# Altium PCB RFCU_INTERFACE.PcbDoc
Units mil, origin at the board's own origin, x right, y up, seen from the top; angles counter-clockwise.
Board outline 2125 x 2650 mil, 2 copper layers (Top Layer, Bottom Layer); 75 components, 56 nets, 236 pads, 31 vias.
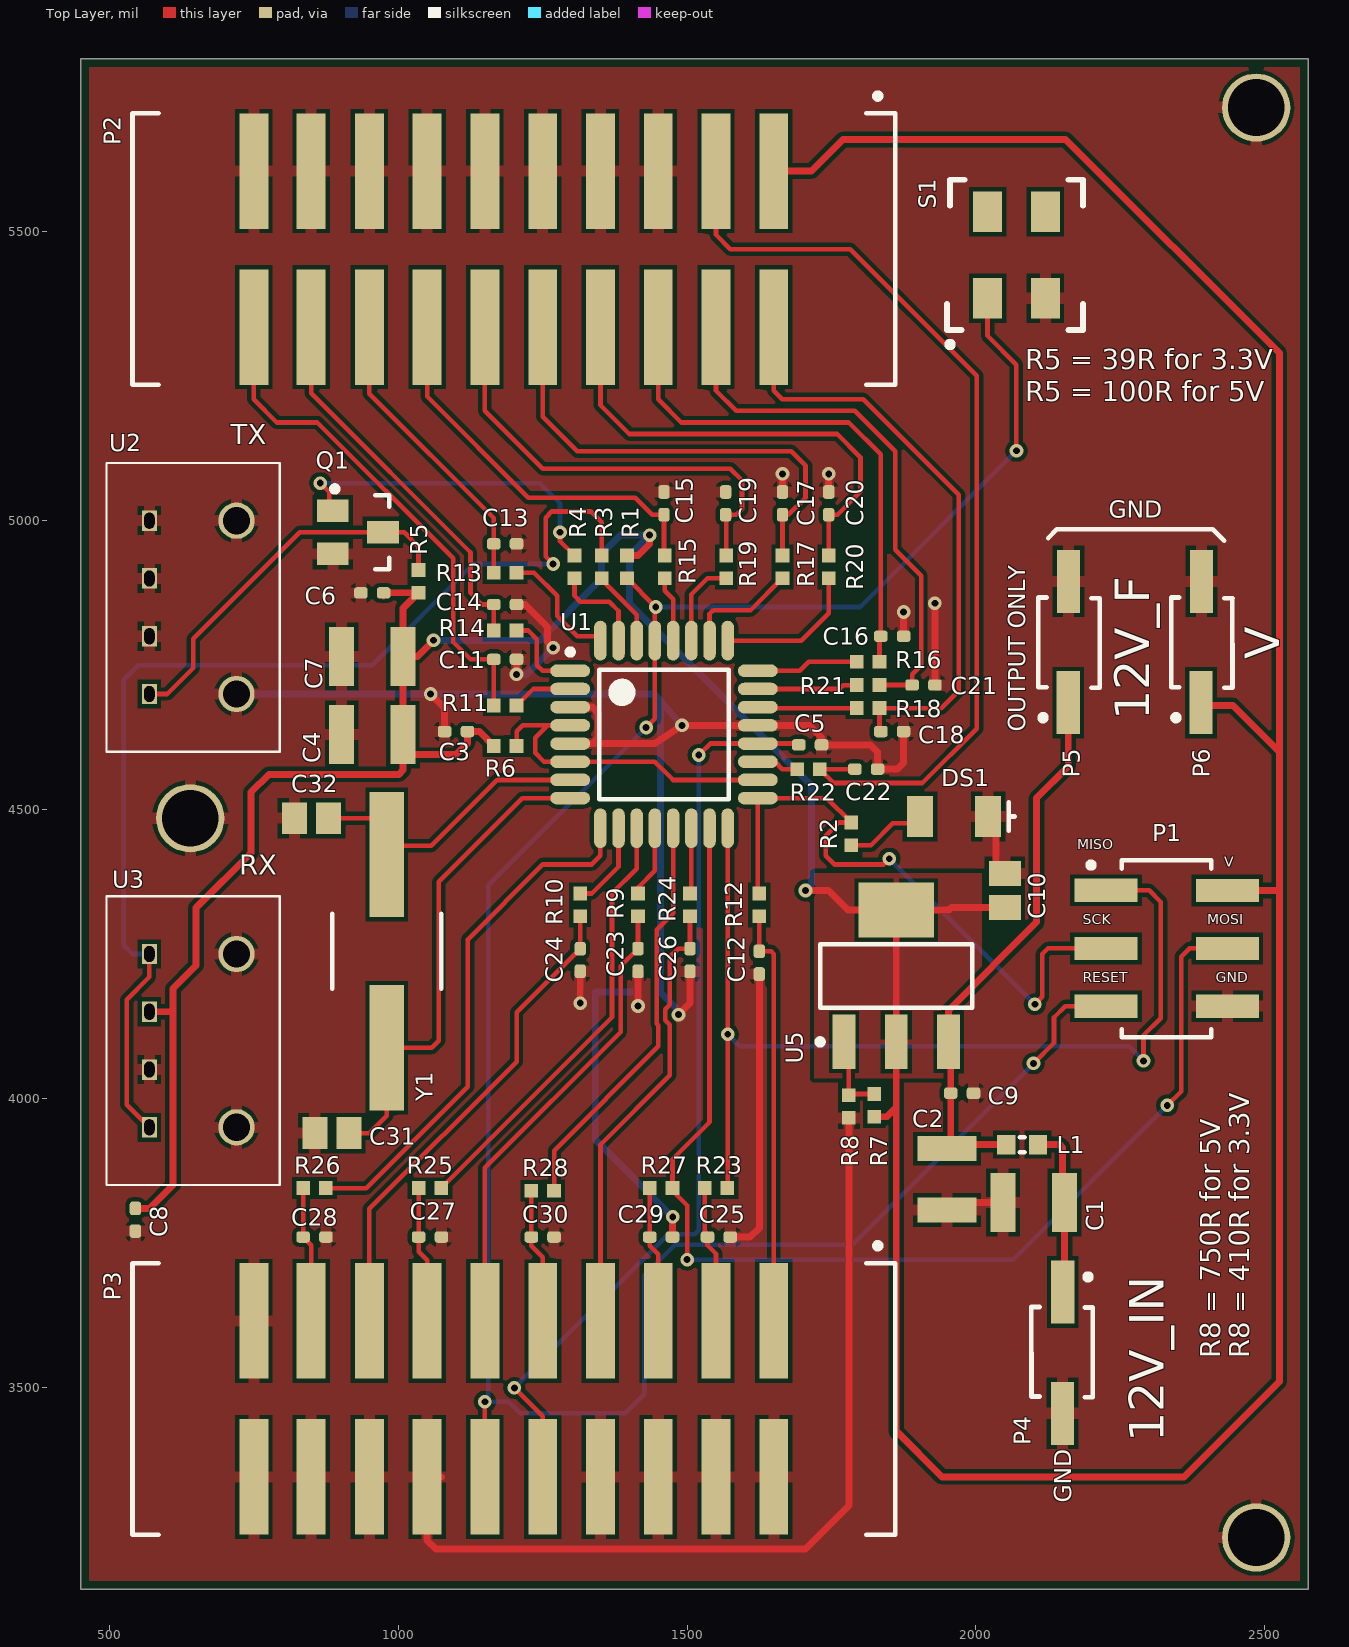
[diagram p0: Top Layer view]
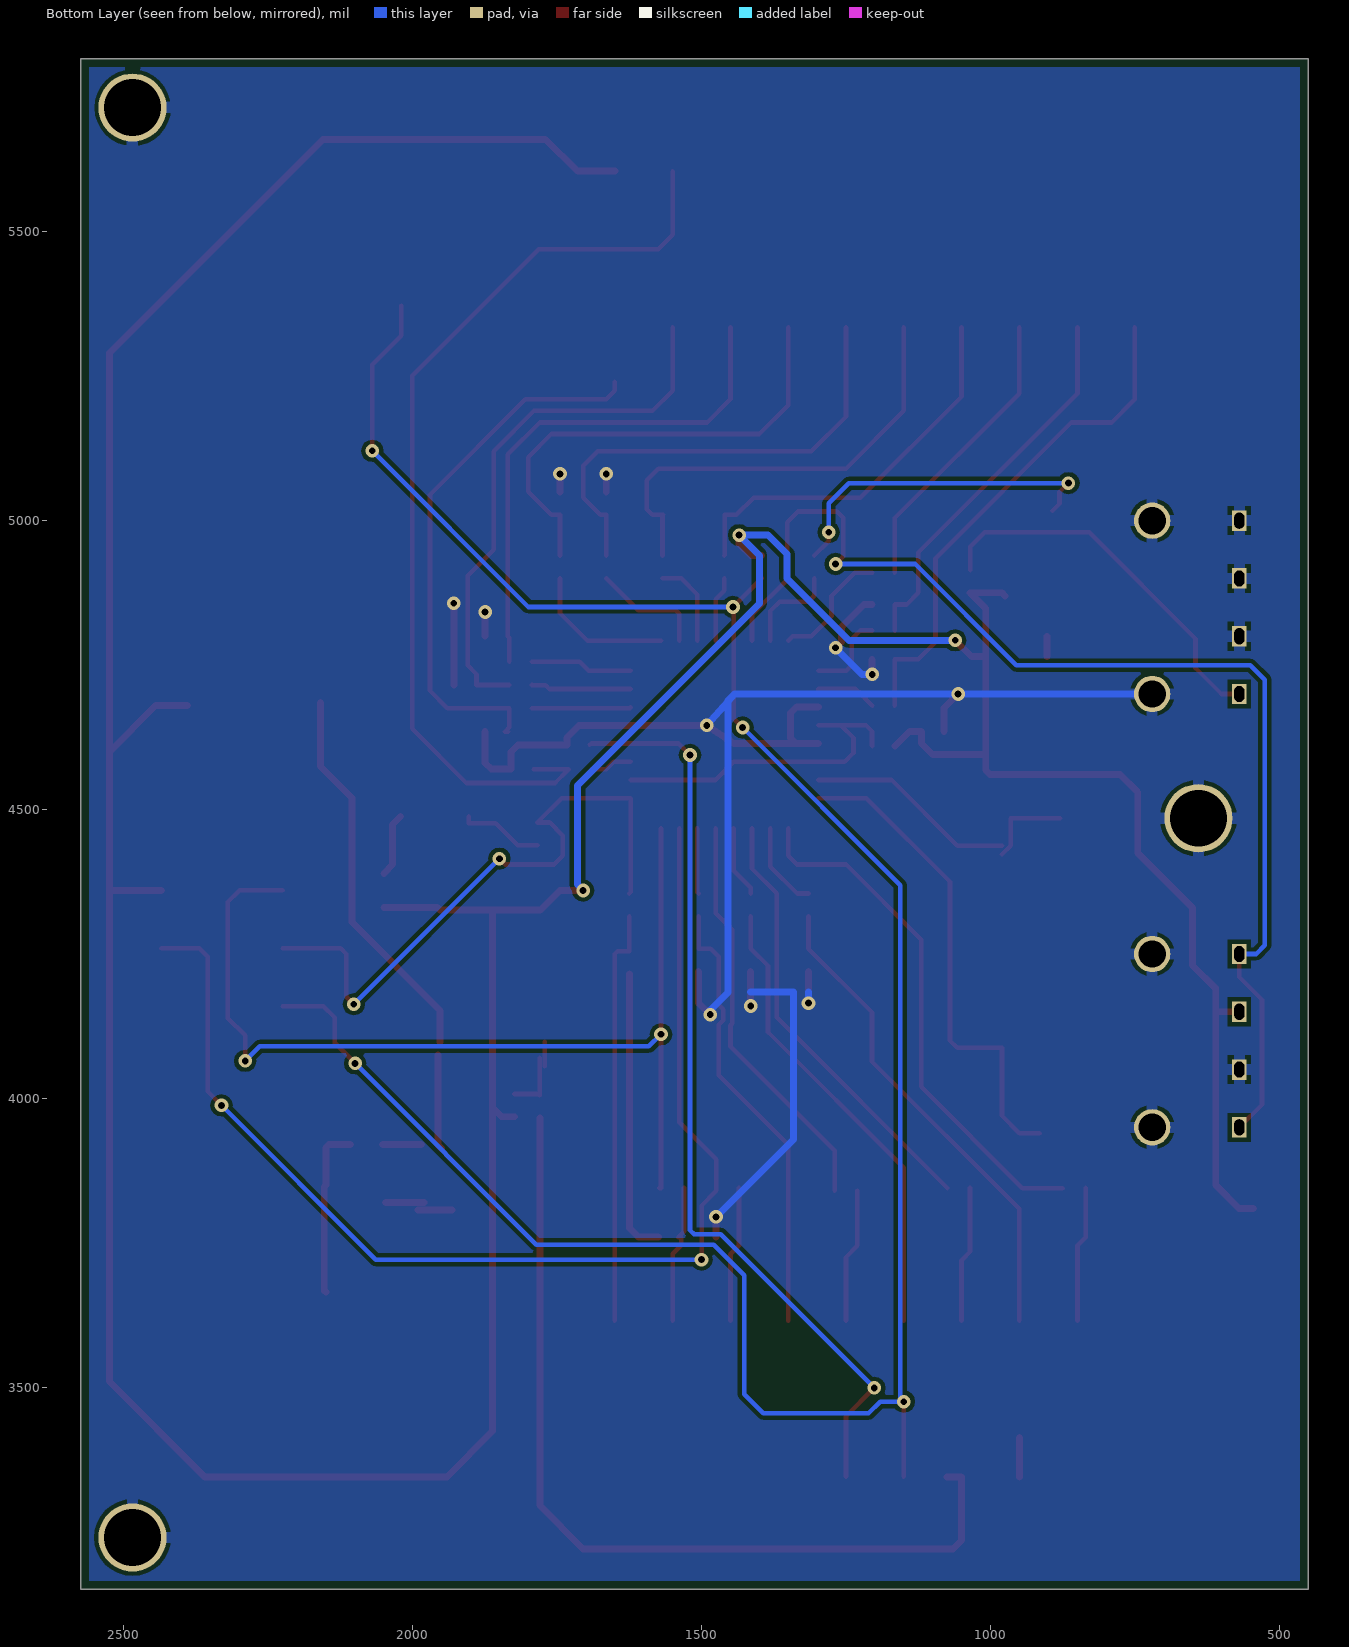
[diagram p1: Bottom Layer view, seen from below]
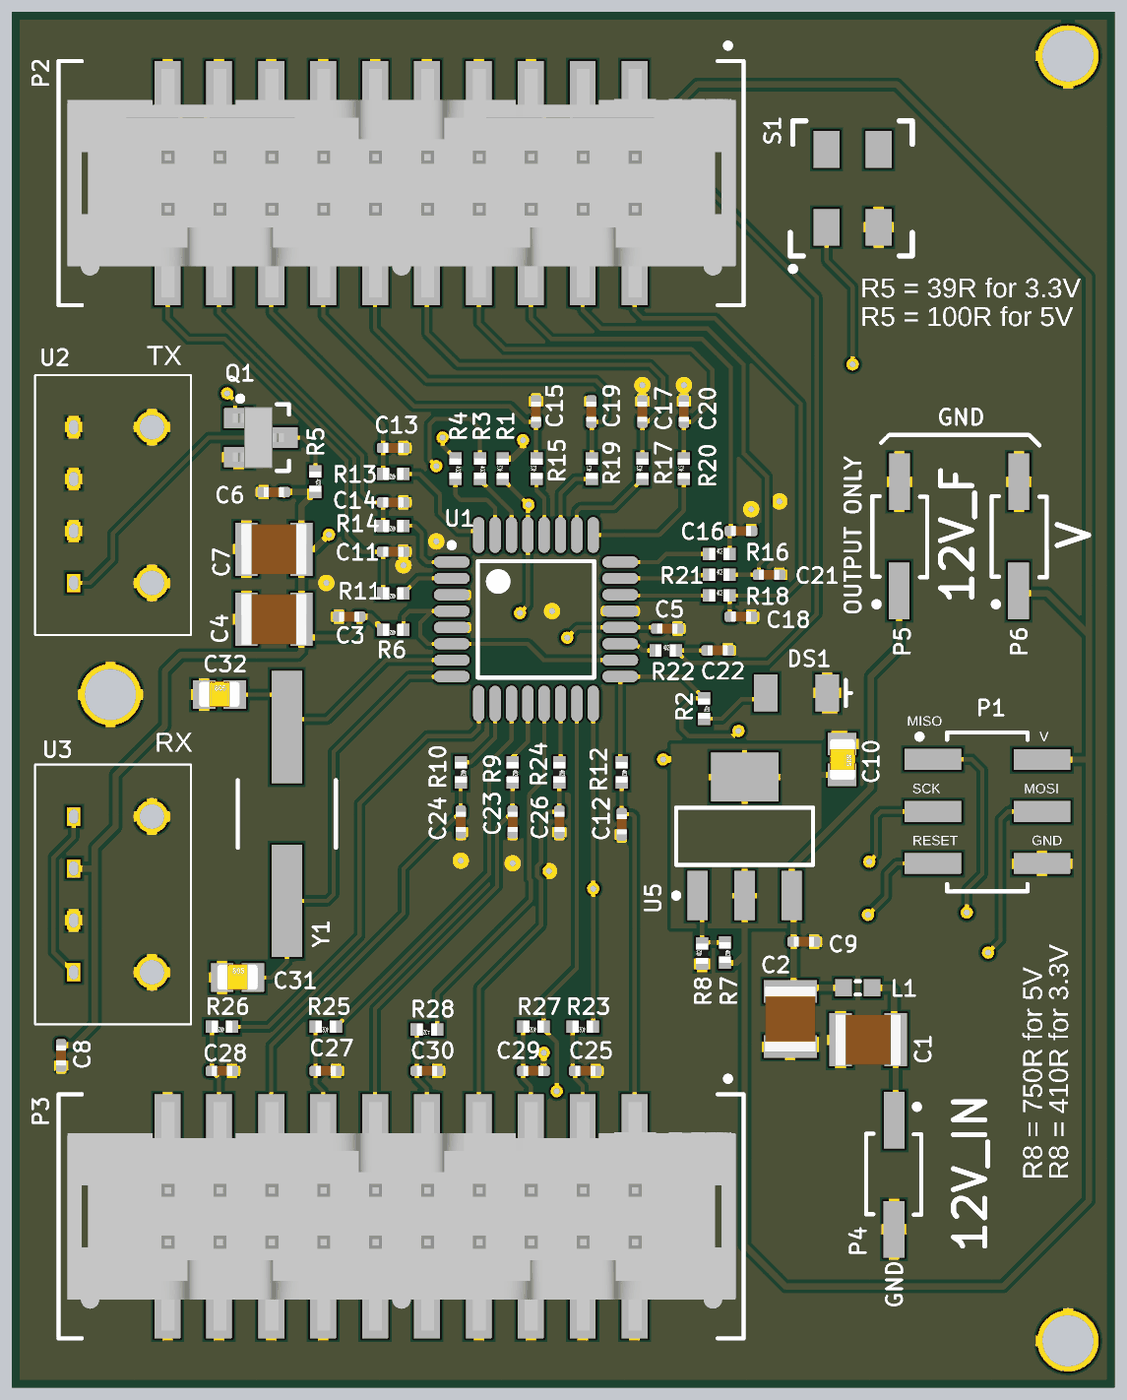
[diagram p2: 3D render of the assembled board from above, using the file's embedded part models]

## Layer stack, top to bottom
Top Layer: signal copper 1.4
Dielectric: dielectric 12.6, FR-4, Dk 4.8
Bottom Layer: signal copper 1.4

## Board outline
450,5800 450,3150 2575,3150 2575,5800 450,5800

## Design rules (kind name [scope] priority, off if disabled: settings)
Clearance [All] p1: gap=7
MinimumSolderMaskSliver [All] p1: minsoldermaskwidth=0.39
PolygonConnect Via_connect [isVia] p1: connectstyle=Direct reliefconductorwidth=10 reliefentries=4 polygonreliefangle="90 Angle"
PolygonConnect [All] p2: connectstyle=Relief reliefconductorwidth=20 reliefentries=4 polygonreliefangle="90 Angle"
RoutingVias [All] p1: holewidth=11.81 width=23.62 viastyle="Through Hole" minholewidth=11.81 minwidth=23.62 maxholewidth=11.81 maxwidth=23.62
SilkscreenOverComponentPads [All] p1: minsilkscreentomaskgap=3.94
SolderMaskExpansion [All] p1: expansion=4
Width Power [InNetClass('Power')] p1: maxlimit=12 minlimit=12 preferedwidth=12
Width [All] p2: maxlimit=8 minlimit=8 preferedwidth=8
26 further rules are at their usual default settings.

## Classes and differential pairs
net class Power: 12V 12V_IN GND V
component class Sheet1: C1 C2 C3 C4 C5 C6 C7 C8 C9 C10 C31 C32 DS1 L1 P1 P2 P3 P4 P5 P6 Q1 R1 R2 R3 R4 R5 R6 R7 R8 S1 U1 U2 U3 U5 Y1
component class Sheet2: C11 C12 C13 C14 C15 C16 C17 C18 C19 C20 C21 C22 C23 C24 C25 C26 C27 C28 C29 C30 R9 R10 R11 R12 R13 R14 R15 R16 R17 R18 R19 R20 R21 R22 R23 R24 R25 R26 R27 R28

## Components (designator, comment, footprint, x,y, rotation, side; value= is the part's Value field where it differs from the comment)
C1 "10uF" CAPC3225X200L 2100,3820 r0 top
C2 "10uF" CAPC3225X200L 1950,3860 r90 top
C3 "0.1uF" CAPC1005X60L 1100,4635 r0 top
C4 "10uF" CAPC3225X200L 955,4630 r0 top
C5 "0.1uF" CAPC1005X60L 1713,4612 r180 top
C6 "0.1uF" CAPC1005X60L 955,4875 r0 top
C7 "10uF" CAPC3225X200L 955,4765 r0 top
C8 "0.1uF" CAPC1005X60L 545,3790 r270 top
C9 "0.1uF" CAPC1005X60L 1976,4009 r180 top
C10 "1uF" CAPC2012X127L 2050,4360 r270 top
C11 "0.1uF" CAPC1005X60L 1185,4760 r180 top
C12 "0.1uF" CAPC1005X60L 1625,4235 r90 top
C13 "0.1uF" CAPC1005X60L 1185,4960 r180 top
C14 "0.1uF" CAPC1005X60L 1185,4855 r180 top
C15 "0.1uF" CAPC1005X60L 1460,5030 r270 top
C16 "0.1uF" CAPC1005X60L 1855,4800 r180 top
C17 "0.1uF" CAPC1005X60L 1665,5030 r270 top
C18 "0.1uF" CAPC1005X60L 1855,4635 r180 top
C19 "0.1uF" CAPC1005X60L 1566.67,5030 r270 top
C20 "0.1uF" CAPC1005X60L 1745,5030 r270 top
C21 "0.1uF" CAPC1005X60L 1909.2,4715.67 r180 top
C22 "0.1uF" CAPC1005X60L 1810,4570 r180 top
C23 "0.1uF" CAPC1005X60L 1415,4239.69 r90 top
C24 "0.1uF" CAPC1005X60L 1315,4239.69 r90 top
C25 "0.1uF" CAPC1005X60L 1555,3760 r180 top
C26 "0.1uF" CAPC1005X60L 1505,4239.69 r90 top
C27 "0.1uF" CAPC1005X60L 1055,3760 r180 top
C28 "0.1uF" CAPC1005X60L 855,3760 r180 top
C29 "0.1uF" CAPC1005X60L 1455,3760 r180 top
C30 "0.1uF" CAPC1005X60L 1250,3760 r180 top
C31 "1uF" CAPC2012X127L 885,3940 r0 top
C32 "1uF" CAPC2012X127L 850,4485 r0 top
DS1 "SML-LX1206GC-TR" LEDC3216X120N 1962,4488 r180 top
L1 "180R" INDC1608X130L 2080,3920 r180 top
P1 "SMT Header 3X2" "HEADER 3x2, SMT" 2330,4260 r270 top
P2 "N2520-6V0C-RB-WE" 3M_N2520-6V0C-RB-WE 1200,5470 r180 top locked
P3 "N2520-6V0C-RB-WE" 3M_N2520-6V0C-RB-WE 1200,3480 r180 top locked
P4 "SMT Header 1X2" "HEADER 1x2, SMT" 2150,3560 r180 top
P5 "SMT Header 1X2" "HEADER 1x2, SMT" 2160,4790 r0 top
P6 "SMT Header 1X2" "HEADER 1x2, SMT" 2390,4790 r0 top
Q1 "BSS138" SOT95P245X110-3N 930,4980 r0 top
R1 "1K" RESC1005X40L 1396,4920 r90 top
R2 "768R" RESC1005X40L 1784,4458 r270 top
R3 "1K" RESC1005X40L 1352,4920 r270 top
R4 "1K" RESC1005X40L 1305,4920 r270 top
R5 "47R" RESC1005X40L 1035,4895 r270 top
R6 "0R" RESC1005X40L 1185,4610 r180 top
R7 "249R" RESC1005X40L 1824,3988 r270 top
R8 "1K" RESC1005X40L 1780,3986 r90 top
R9 "75R" RESC1005X40L 1415,4335 r270 top
R10 "75R" RESC1005X40L 1315,4335 r270 top
R11 "75R" RESC1005X40L 1185,4680 r180 top
R12 "75R" RESC1005X40L 1625,4335 r270 top
R13 "75R" RESC1005X40L 1185,4910 r180 top
R14 "75R" RESC1005X40L 1185,4810 r180 top
R15 "75R" RESC1005X40L 1461,4920 r90 top
R16 "75R" RESC1005X40L 1813.2,4755.67 r0 top
R17 "75R" RESC1005X40L 1665,4920 r90 top
R18 "75R" RESC1005X40L 1813.2,4675.67 r0 top
R19 "75R" RESC1005X40L 1567.67,4920 r90 top
R20 "75R" RESC1005X40L 1745,4920 r90 top
R21 "75R" RESC1005X40L 1813.2,4715.67 r0 top
R22 "75R" RESC1005X40L 1710,4570 r0 top
R23 "75R" RESC1005X40L 1550,3845 r180 top
R24 "75R" RESC1005X40L 1505,4335 r270 top
R25 "75R" RESC1005X40L 1055,3845 r180 top
R26 "75R" RESC1005X40L 855,3845 r180 top
R27 "75R" RESC1005X40L 1455,3845 r180 top
R28 "75R" RESC1005X40L 1250,3840 r180 top
S1 "7914J-1-000-E" 7914J-X-XXX-X 2070,5460 r0 top
U1 "ATmega328P" TQFP-32A 1460,4630 r0 top
U2 "HFBR-1505CFZ" HFBR-X505XFZ 720,5000 r270 top locked
U3 "HFBR-2505CFZ" HFBR-X505XFZ 720,4250 r270 top locked
U5 "LM317" SOT223_4N 1862,4212 r90 top
Y1 "ATS040B" HC-49SM 980,4255 r90 top

## Footprints (in the part's own frame and the unit in brackets; to place one, negate y for a bottom-side part, rotate by r counter-clockwise, add the part's x,y. Pads: shape width x height; smd on the part's side, far side on the other; paste and mask are expansions set on the pad)
3M_N2520-6V0C-RB-WE [mm] "3m, 2.56mm pitch, Shrouded, 10x2 Connector"
  rect 1.27x5.08 smd: 1(-11.43,-3.43) 2(-11.43,3.43) 3(-8.89,-3.43) 4(-8.89,3.43) 5(-6.35,-3.43) 6(-6.35,3.43) 7(-3.81,-3.43) 8(-3.81,3.43) 9(-1.27,-3.43) 10(-1.27,3.43) 11(1.27,-3.43) 12(1.27,3.43) 13(3.81,-3.43) 14(3.81,3.43) 15(6.35,-3.43) 16(6.35,3.43) 17(8.91,-3.43) 18(8.91,3.43) 19(11.43,-3.43) 20(11.43,3.43)
  silkscreen extent -16.76,-6.86 16.76,5.97, body extent -16.38,-5.59 16.33,5.59, height 10.2
7914J-X-XXX-X [mm] "Surface mount, Sealed key switch"
  rect 1.27x1.79 smd: 1(-1.27,-1.905) 2(1.27,-1.905) 3(-1.27,1.905) 4(1.27,1.905)
  silkscreen extent -3.05,-4.06 2.92,3.3, body extent -2.54,-2.54 2.54,2.54, height 4.19
CAPC1005X60L [mm] "Chip Capacitor, Body 1.0x0.5mm, IPC High Density"
  rrect50% 0.6x0.5 smd: 1(-0.5,0) 2(0.5,0)
  body extent -0.5,-0.25 0.5,0.25, height 0.49
CAPC2012X127L [mm] "Chip Capacitor, Body 2.0x1.3mm, IPC High Density"
  rect 1.1x1.4 smd: 1(-0.75,0) 2(0.75,0)
  body extent -1,-0.61 1,0.64, height 0.78
CAPC3225X200L [mm] "Chip Capacitor, Body 3.2x2.5mm, IPC High Density"
  rect 1.1x2.6 smd: 1(-1.35,0) 2(1.35,0)
  body extent -1.6,-1.25 1.6,1.25, height 2.5
HC-49SM [mm]
  rect 5.5x1.5 smd: 1(-4.25,0) 2(4.25,0)
  silkscreen extent -1.65,-2.4 1.65,2.4, body extent -6.4,-2.42 6.4,2.42, height 4.3
"HEADER 1x2, SMT" [mm] "SMT Header, 1 x 2 rows, 2.54mm pitch"
  rect 1.02x2.77 smd: 1(-0.008,-2.667) 2(0.008,2.667)
  silkscreen extent -1.32,-3.45 1.37,1.96
"HEADER 3x2, SMT" [mm] "SMT Header, 3 x 2 rows, 2.54mm pitch"
  rect 1.02x2.77 smd: 1(-2.548,-2.667) 2(-2.531,2.667) 3(0.009,-2.667) 4(0.009,2.667) 5(2.549,-2.667) 6(2.549,2.667)
  silkscreen extent -3.86,-3.45 3.91,1.96
HFBR-X505XFZ [mm]
  round 1.6 hole 1.2: 1(7.62,0) 4(0,0)
  rect 0.9x0.65 hole 0.45 slot 0.7 at 0 deg: 5(0,-3.83) 6(2.54,-3.83) 7(5.08,-3.83) 8(7.62,-3.83)
  silkscreen extent -2.54,-5.72 10.16,1.91, body extent -2.54,-11.93 10.16,1.9, height 9.85
INDC1608X130L [mm] "Chip Inductor, 2-Leads, Body 1.6x0.8mm, IPC High Density"
  rect 0.8x0.85 smd: 1(-0.7,0) 2(0.7,0)
  silkscreen extent -0.1,-0.33 0.1,0.33, body extent -0.88,-0.48 0.87,0.48, height 1.3
LEDC3216X120N [mm] "LED Chip, 3.2mm x 1.6mm"
  rect 1.15x1.8 smd: 1(-1.5,0) 2(1.5,0)
  silkscreen extent -2.67,-0.64 -2.41,0.63, body extent -1.52,-0.89 1.52,0.89, height 1.2
RESC1005X40L [mm] "Chip Resistor, Body 1.1x0.5mm, IPC High Density"
  rect 0.6x0.6 smd: 1(-0.5,0) 2(0.5,0)
  body extent -0.5,-0.3 0.5,0.3, height 0.2
SOT95P245X110-3N [mm] "SOT23, 3-Leads, Body 3.0x2.6mm (max), Pitch 0.95mm, IPC Medium Density"
  rect 1.4x1 smd: 1(-1.1,0.95) 2(-1.1,-0.95) 3(1.1,0)
  silkscreen extent -1.14,-1.63 1.37,2.03, body extent -1.38,-1.5 1.12,1.5, height 1.05
SOT223_4N [mm] "SOT223, 4-Leads, Body 6.5x3.5mm, Pitch 2.3mm, Lead Span 7mm, IPC Medium Density"
  rect 2.4x1 smd: 1(-2.9,2.3) 2(-2.9,0) 3(-2.9,-2.3)
  rect 2.4x3.3 smd: 4(2.9,0)
  silkscreen extent -3.02,-3.35 1.4,3.47, body extent -1.85,-3.35 1.85,3.35, height 1.8
TQFP-32A [mm] "TQFP, 32-Leads, Body 9.3x9.3mm (max), Pitch 0.80mm, IPC Medium Density"
  oval 1.75x0.55 smd: 1(-4.125,2.8) 2(-4.125,2) 3(-4.125,1.2) 4(-4.125,0.4) 5(-4.125,-0.4) 6(-4.125,-1.2) 7(-4.125,-2) 8(-4.125,-2.8) 17(4.125,-2.8) 18(4.125,-2) 19(4.125,-1.2) 20(4.125,-0.4) 21(4.125,0.4) 22(4.125,1.2) 23(4.125,2) 24(4.125,2.8)
  oval 0.55x1.75 smd: 9(-2.8,-4.125) 10(-2,-4.125) 11(-1.2,-4.125) 12(-0.4,-4.125) 13(0.4,-4.125) 14(1.2,-4.125) 15(2,-4.125) 16(2.8,-4.125) 25(2.8,4.125) 26(2,4.125) 27(1.2,4.125) 28(0.4,4.125) 29(-0.4,4.125) 30(-1.2,4.125) 31(-2,4.125) 32(-2.8,4.125)
  silkscreen extent -4.25,-2.85 2.85,3.75, body extent -3.5,-3.5 3.5,3.5, height 1.2

## Part data
C1 C2 C4 C7: library part CAP-CER-5, "10uF, Ceramic Capacitor"
C3 C5 C6 C8 C9 C11 C12 C13 C14 C15 C16 C17 C18 C19 C20 C21 C22 C23 C24 C25 C26 C27 C28 C29 C30: library part CAP-CER-1, "0.1uF, Ceramic Capacitor"
C10 C31 C32: library part CAP-CER-8, "1uF, Ceramic Capacitor"
DS1: library part OPTO-LED-0, "Green, Surface mount, LED, 1206"
L1: library part IND-FB-2, "180 Ohm, Chip Ferrite Brad"
P1: "2x3, 2.54 mm Pitch, Male Header, Surface Mount"
P2 P3: library part CONN-PCB-10, "2x10, 2.54mm Pitch, Male Shrouded Header"
P4 P5 P6: library part CONN-PCB-28, "1x2, 2.54 mm Pitch, Male Header, Surface Mount"
Q1: library part TRANS-NFET-0, "N-Channel Logic Level Enhancement Mode Field Effect Transistor"
R1 R3 R4 R8: library part RES-TF-8, "1K, 1.1mm x 0.5mm, Thick Film Resistor"
R2: library part RES-TF-48, "768R, 1.1mm x 0.5mm, Thick Film Resistor"
R5: library part RES-TF-12, "47R, 1.1mm x 0.5mm, Thick Film Resistor"
R6: library part RES-TF-0, "0R, 1.1mm x 0.5mm, Thick Film Resistor"
R7: library part RES-TF-15, "249R, 1.1mm x 0.5mm, Thick Film Resistor"
R9 R10 R11 R12 R13 R14 R15 R16 R17 R18 R19 R20 R21 R22 R23 R24 R25 R26 R27 R28: library part RES-TF-32, "75R, 1.1mm x 0.5mm, Thick Film Resistor"
S1: library part ELMECH-SW-1, "4mm, Surface mount, J-Hook, Sealed Key Switch"
U1: library part IC-CPU-2, "8-Bit Microcontroller with 32KB Flash"
U2: library part OPTO-TX-0, "650nm Fibre Optic Transmitter"
U3: library part OPTO-RX-0, "2MBd Fibre Optic Receiver"
U5: library part IC-REG-9, "Adjustable Voltage regulator 1.25V-37V"
Y1: library part RESN-XTAL-6, "4 MHz, Surface mount, Crystal Oscillator"

## Free pads (board coordinates)
  round 118.11 hole 98.43: 2(640,4485) 2(2485,3240) 2(2485,5715)

## Via types
v1: diameter 23.62, hole 11.81, Top Layer to Bottom Layer, 31 vias

## Nets (pads, with @x,y where several pads share a name; then routed paths per layer and width w, separated by ;. In a path a pad name is that pad's centre, name@x,y a point inside that pad or via, vN(x,y) a via of type N, cw(c..) or ccw(c..) an arc to the next point about the centre after c; other vN are vias at no path point)
12V: C2.2 C9.2 L1.2 P5.1 U5.3 | length 904.9
  Top Layer w12: C2.2 1956.31,3919.46 C9.2 U5.3@1956.31,4075 ; U5.3 1952.55,4152.55 2105,4305 2105,4520 2159.67,4574.67 P5.1 ; C2.2@1985,3920 L1.2
12V_IN: C1.2 L1.1 P4.1 | length 297
  Top Layer w12: L1.1 2145,3920 2150,3915 2150,3850.15 2153.15,3847 C1.2 2153.15,3667.82 P4.1
A0: R21.1 U1.23 | length 174
  Top Layer w8: U1.23 1763.74,4708.74 1770,4715 1792.85,4715 R21.1
A0_F: C21.2 P2.4 R21.2 | length 949.5
  Top Layer w8: P2.4 1550,5225 1585,5190 1790,5190 1860,5120 1860,4950 1905,4905 1905,4750 1889.52,4734.52 C21.2 R21.2
A1: R16.1 U1.24 | length 177.5
  Top Layer w8: U1.24 1695.24,4740.24 1710.67,4755.67 R16.1
A1_F: C16.2 P2.6 R16.2 | length 909.8
  Top Layer w8: P2.6 1450,5210 1490,5170 1780,5170 1835.32,5114.69 C16.2 1832.89,4797.57 R16.2
A2: R20.1 U1.25 | length 254.8
  Top Layer w8: U1.25 1697.4,4792.4 1745,4840 R20.1
A2_F: C20.2 P2.8 R20.2 | length 839.3
  Top Layer w8: P2.8 1350,5200 1400,5150 1590,5150 ; 1575,5150 1590,5150 ; R20.2 C20.2 1760.31,5010.31 1800,5050 1800,5110 1760,5150 1590,5150
A3: R17.1 U1.26 | length 198.1
  Top Layer w8: U1.26 1538.74,4838.74 1545,4845 1609.68,4845 R17.1
A3_F: C17.2 P2.10 R17.2 | length 843.1
  Top Layer w8: P2.10 1250,5180 1310,5120 1560,5120 ; 1540,5120 1560,5120 ; R17.2 C17.2 1675.31,5010.31 1705,5040 1705,5095 1680,5120 1560,5120
A4: R19.1 U1.27 | length 151.9
  Top Layer w8: U1.27 1507.24,4872.24 1535.32,4900.32 R19.1
A4_F: C19.2 P2.12 R19.2 | length 828.1
  Top Layer w8: P2.12 1150,5190 1250,5090 1540,5090 ; 1505,5090 1540,5090 ; R19.2 1567.67,5009.31 C19.2 1585.31,5010.31 1595,5020 1595,5070 1575,5090 1540,5090
A5: R15.1 U1.28 | length 114
  Top Layer w8: R15.1 1461,4879 1475.75,4864.25 U1.28
A5_F: C15.2 P2.14 R15.2 | length 685.8
  Top Layer w8: P2.14 1050,5215 1225,5040 1410,5040 1439.69,5010.31 C15.2 1460,4940.69 R15.2
A6: R22.1 U1.19 | length 73.2
  Top Layer w8: U1.19 1652.24,4582.76 1665,4570 R22.1
A6_F: C22.2 P2.3 R22.2 | length 1653.9
  Top Layer w8: P2.3 1550,5495 1575,5470 1782,5470 2001,5251 2001,4640 1907,4546 1753.69,4546 R22.2 C22.2
A7: R18.1 U1.22 | length 171.8
  Top Layer w8: U1.22 1623.98,4675.67 R18.1
A7_F: C18.2 P2.2 R18.2 | length 947.4
  Top Layer w8: P2.2@1650,5240 1650,5225 1665,5210 1805,5210 1970,5045 1970,4705.67 1940,4675.67 R18.2 1832.89,4642.43 1840.32,4635 C18.2 C18.2@1835.07,4635
AREF: C5.2 P3.10 U1.20 | length 1611.3
  Top Layer w8: v1(1201,3499) 1250,3450 P3.10 ; v1(1520,4594.5) 1539.75,4614.25 U1.20 1691.06,4614.25 C5.2
  Bottom Layer w8: v1(1201,3499) 1467,3765 1513,3765 1520,3772 v1(1520,4594.5)
D2: R13.1 U1.32 | length 214.3
  Top Layer w8: R13.1 1235,4910 1275,4870 1275,4835 1310,4800 1342.17,4800 U1.32
D2_F: C13.2 P2.16 R13.2 | length 514.1
  Top Layer w8: P2.16 950,5220 1165.31,5004.69 C13.2 R13.2
D3: R14.1 U1.1 | length 152.3
  Top Layer w8: R14.1 1225,4810 1240,4795 1240,4750 1249.76,4740.24 U1.1@1285,4740.24 ; U1.1@1280.89,4740.24 U1.1@1285,4740.24 ; U1.1 U1.1@1285,4740.24
D3_F: C14.2 P2.18 R14.2 | length 667.8
  Top Layer w8: P2.18 849.21,5220.79 1125,4945 1125,4875 1145,4855 C14.2 R14.2
D4: R11.1 U1.2 | length 104.8
  Top Layer w8: R11.1 1233.43,4708.74 U1.2
D4_F: C11.2 P2.20 R11.2 | length 891.6
  Top Layer w8: P2.20 750,5210 790,5170 860,5170 1095,4935 1095,4790 1125,4760 C11.2 R11.2
D5: R26.1 U1.9 | length 910.5
  Top Layer w8: R26.1@874.69,3844.69 944.69,3844.69 1120,4020 1120,4275 1250,4405 1335,4405 1349.76,4419.76 U1.9
D5_F: C28.2 P3.17 R26.2 | length 235.7
  Top Layer w8: R26.2 C28.2 849.21,3746.1 P3.17
D6: R10.1 U1.10 | length 151.9
  Top Layer w8: R10.1 1334.69,4354.69 1381.26,4401.26 U1.10
D6_F: C24.2 P3.15 R10.2 | length 851.5
  Top Layer w8: P3.15 950,3690 950,3808.79 1205,4063.79 1205,4149.37 C24.2 R10.2
D7: R25.1 U1.11 | length 762.6
  Top Layer w8: R25.1 1370,4140.32 1370,4355 1412.76,4397.76 U1.11
D7_F: C27.2 P3.13 R25.2 | length 236
  Top Layer w8: R25.2 C27.2 1035.31,3734.69 1050,3720 P3.13
D8: R9.1 U1.12 | length 125
  Top Layer w8: R9.1 1415,4365 1444.25,4394.25 U1.12
D8_F: C23.2 P3.11 R9.2 | length 810
  Top Layer w8: P3.11 1150,3880 1385,4115 1385,4229.37 C23.2 R9.2
D9: R28.1 U1.13 | length 715.3
  Top Layer w8: R28.1 1269.69,3909.69 1450,4090 1450,4126.53 1447.19,4129.34 1447.19,4292.19 1475.75,4320.75 U1.13
D9_F: C30.2 P3.9 R28.2 | length 233.1
  Top Layer w8: R28.2 C30.2 1230.31,3744.69 1250,3725 P3.9
D10: R24.1 U1.14 | length 113.8
  Top Layer w8: R24.1 1507.24,4356.93 U1.14
D10_F: C26.2 P3.7 R24.2 | length 783
  Top Layer w8: P3.7 1350,3920 1470,4040 1470,4127.74 1462.19,4135.55 1462.19,4154.45 1470,4162.26 1470,4245 1484.37,4259.37 C26.2 R24.2
D11: P1.4 R27.1 U1.15 | length 2078.2
  Top Layer w8: v1(1500,3721) 1500,3814.69 1474.69,3840 R27.1 1474.69,3894.69 1538.74,3958.74 U1.15 ; v1(2331,3988) 2355,4012 2355,4245 2369.67,4259.67 P1.4
  Bottom Layer w8: v1(1500,3721) 2064,3721 v1(2331,3988)
D11_F: C29.2 P3.5 R27.2 | length 236
  Top Layer w8: R27.2 1435.31,3840 C29.2 1435.31,3744.69 1450,3730 P3.5
D12: P1.1 R23.1 U1.16 | length 2113.5
  Top Layer w8: R23.1 1573.13,3845 1570.24,3847.89 U1.16 v1(1570.24,4111) ; P1.1 2299.67,4360.33 2320,4340 2320,4139 2290,4109 v1(2290,4065)
  Bottom Layer w8: v1(1570.24,4111) 1591.24,4090 2265,4090 v1(2290,4065)
D12_F: C25.2 P3.3 R23.2 | length 245.2
  Top Layer w8: R23.2 1530.31,3770 1540.31,3760 C25.2 1535.31,3745.55 1550,3730.86 P3.3
D13: P1.3 R2.1 R12.1 U1.17 | length 1116.7
  Top Layer w8: R12.1 1622.4,4357.28 U1.17 1741.92,4519.76 R2.1 1762.69,4477.69 1740,4455 1740,4420 1755,4405 1840,4405 v1(1850,4415) ; v1(2102,4163) 2115,4176 2115,4250 2124.67,4259.67 P1.3
  Bottom Layer w8: v1(1850,4415) v1(2102,4163)
D13_F: C12.2 P3.1 R12.2 | length 722.5
  Top Layer w8: R12.2 C12.2 1645.31,4254.69 1650,4250 P3.1
GND: C1.1 C2.1 C3.1 C4.1 C5.1 C6.1 C7.1 C8.2 C9.1 C10.1 C11.1 C12.1 C13.1 C14.1 C15.1 C16.1 C17.1 C18.1 C19.1 C20.1 C21.1 C22.1 C23.1 C24.1 C25.1 C26.1 C27.1 C28.1 C29.1 C30.1 C31.1 C32.1 DS1.1 P1.6 P2.5 P2.7 P2.9 P2.11 P2.13 P2.15 P2.17 P2.19 P3.2 P3.4 P3.6 P3.8 P3.14 P3.16 P3.18 P3.19 P3.20 P4.2 P5.2 P6.2 pad.2 Q1.2 R8.1 S1.2 U1.3 U1.5 U1.21 U2.1 U2.4 U2.5 U2.6 U2.7 U3.1 U3.4 U3.7 | length 5896.4
  Top Layer w12: C7.1 C7.1@901.85,4800 ; P3.16 P3.16@950,3413 ; v1(1056,4700) 1080.32,4675.68 C3.1 ; P3.14@1074.96,3344.96 P3.14 1050,3235 1065,3220 1705,3220 1780,3295 R8.1 ; v1(1204.69,4734) C11.1 ; C14.1 1219,4855 1258,4816 1258,4790 v1(1268,4780) ; U1.5 1336.25,4614.25 ; U1.3 1336,4677.24 1346,4667.24 1346,4624 1336.25,4614.25 ; v1(1315,4165) C24.1 ; v1(1415,4160) C23.1 ; C29.1 1474.69,3794.69 v1(1475,3795) ; v1(1485,4145) 1505,4165 C26.1 ; C25.1 1609,3760 1625,3776 C12.1 ; C17.1 v1(1665,5081) ; C20.1 v1(1745,5081) ; C18.1 1874.69,4580.69 1864,4570 C22.1 1829.69,4600 1817.69,4612 C5.1 1732.69,4625.06 1712,4645.75 U1.21 v1(1491,4645.75) 1444,4614.25 1336.25,4614.25 ; C16.1 v1(1874.69,4842) ; C21.1 v1(1928.89,4857) ; C2.1@1932,3806.85 C2.1 C2.1@1991,3806.85 ; C2.1@1980,3820 C1.1 ; DS1.1 2035,4474.06 2035,4404.53 C10.1
  Bottom Layer w12: U2.1 v1(1056,4700) 1443,4700 ; v1(1204.69,4734) 1222,4734 v1(1268,4780) ; v1(1315,4165) 1315,4184 ; 1415,4184 1341,4184 1341,3929 v1(1475,3795) ; v1@1488.5,4148.5 1454,4183 1454,4687.57 ; v1(1491,4645.75) 1454,4687.57 ; 1443,4700 1454,4687.57 ; 1443,4700 1454,4689 1454,4687.57
NetC31_2: C31.2 U1.8 Y1.1 | length 853.2
  Top Layer w8: C31.2 950,3940 980,3970 Y1.1 1057.68,4087.68 1070,4100 1070,4375 1214.76,4519.76 U1.8
NetC32_2: C32.2 U1.7 Y1.2 | length 519.2
  Top Layer w8: C32.2 909.53,4485 965,4485 965,4437.32 Y1.2 ; Y1.2@980,4437.32 1057.32,4437.32 1171.26,4551.26 U1.7
NetDS1_2: DS1.2 R2.2 | length 146.6
  Top Layer w8: R2.2 1818.31,4438.31 1856,4476 1902.94,4476 DS1.2
NetQ1_3: Q1.3 R5.1 U2.8 | length 662.1
  Top Layer w8: U2.8 600,4700 645,4745 645,4795.71 829.29,4980 1010,4980 1035,4955 R5.1
NetR3_2: R3.2 U1.30 | length 133.1
  Top Layer w8: R3.2 1352,4898 1412.76,4837.24 U1.30
NetR4_2: R4.2 U1.31 | length 168.8
  Top Layer w8: R4.2 1305,4870 1315,4860 1365,4860 1381.26,4843.74 U1.31
NetR6_1: R6.1 U1.4 U1.6 U1.18 | length 622.7
  Top Layer w8: R6.1 1205,4610.31 1205,4635.31 1215.43,4645.75 U1.4 1258.75,4645.75 1237,4624 1237,4598 1252.24,4582.76 U1.6 1444,4582.76 1475.5,4551.26 U1.18
NetR7_1: R7.1 R8.2 U5.1 | length 151.4
  Top Layer w8: U5.1@1771.45,4055.55 U5.1 ; U5.1@1780,4070 R8.2 1782,4007.69 R7.1
RESET: P1.5 P3.12 R1.1 S1.1 U1.29 | length 4217.6
  Top Layer w8: P3.12 v1@1150,3464 ; R1.1 v1@1444.25,4852.06 ; v1(1429,4642) 1444.25,4657.25 U1.29 v1@1444.25,4852.06 ; v1(1445.66,4850.66) v1@1444.25,4852.06 ; S1.1@2020,5371.73 2020,5320 2070,5270 v1(2070,5121) ; v1(2099.67,4060.67) 2135,4096 2135,4140 2154.67,4159.67 P1.5
  Bottom Layer w8: v1(1429,4642) 1156,4369 1156,3481 v1(1150,3475) 1191,3475 1211,3455 1393,3455 1426,3488 1426,3694 1479,3747 1786,3747 v1(2099.67,4060.67) ; v1(1445.66,4850.66) 1799.66,4850.66 v1(2070,5121)
RX: R3.1 U3.5 U3.8 | length 1920.9
  Top Layer w8: U3.8 530,3989.21 530,4171 569.21,4210.21 U3.5 ; v1(1268,4925) 1255,4938 1255,5005 1266,5016 1333,5016 1352,4997 R3.1
  Bottom Layer w8: U3.5 540,4250 525,4265 525,4725 550,4750 955,4750 1130,4925 v1(1268,4925)
TX: Q1.1 R4.1 | length 589.2
  Top Layer w8: v1(865,5065) 880.37,5049.63 880.37,5029.63 Q1.1@892.6,5017.4 ; v1(1280,4980) 1280,4964.69 R4.1
  Bottom Layer w8: v1(865,5065) 1245,5065 1280,5030 v1(1280,4980)
V: C3.2 C4.2 C6.2 C7.2 C8.1 C10.2 P1.2 P2.1 P6.1 R1.2 R5.2 R6.2 R7.2 U3.6 U5.2 U5.4 | length 8270.7
  Top Layer w12: C8.1 569.68,3809.68 610,3850 610,4149.61 ; U3.6 609.61,4150 610,4149.61 ; C6.2@974.69,4870 980,4875.31 R5.2 1008.15,4848.46 C7.2 ; v1(1061,4793) 1033,4765 C7.2 ; R6.2 1140.31,4635 C3.2 1119.69,4614.69 1100,4595 C4.2@1008.15,4595 ; R1.2 1414.69,4939.69 1435,4960 v1(1435,4975) ; P2.1 1715.04,5605.04 1770,5660 2155,5660 2525,5290 2525,4600 ; v1(1705,4360) 1745,4360 1778.83,4326.17 U5.4 ; R7.2 1846.31,3968.31 1862,3984 ; C10.2 1957.3,4330.47 1953,4326.17 U5.4 ; P6.1@2389.67,4680 2445,4680 2525,4600 ; P1.2 2524.67,4359.67 2525,4360 ; 610,4149.61 610,4190 650,4230 650,4330 745,4425 745,4530 776,4561 1001,4561 1008.15,4568.15 C4.2@1008.15,4595 ; C4.2@1008.15,4595 C4.2 C7.2 ; 1862,3984 U5.2 U5.4 ; 1862,3984 1862,3424 1941,3345 2360,3345 2525,3510 2525,4360 ; 2525,4360 2525,4600
  Bottom Layer w12: v1(1061,4793) 1245,4793 1352,4900 ; 1352,4915 1352,4900 ; 1431.63,4825 1420.85,4835.78 ; v1(1705,4360) 1715,4370 1715,4541.63 1420.85,4835.78 ; 1352,4900 1352,4942 1385,4975 v1(1435,4975) 1400,4940 1400,4856.63 1420.85,4835.78
pads on no net: S1.3 S1.4

## Polygon pours and split planes (outlines as drawn)
V on Top Layer "GND" (solid, remove dead copper, pour order 2): 1720,4390 2010,4390 2010,4035 1720,4035 1720,4390
GND on Top Layer "GND" (solid, remove dead copper, pour order 7): 465,5785 2560,5785 2560,3165 465,3165 465,5785
GND on Bottom Layer "GND" (solid, remove dead copper, pour order 9): 465,5785 2560,5785 2560,3165 465,3165 465,5785

## Silkscreen, mask and mechanical layers (free items; w line width, h text height)
Top Overlay:
  lines w7.87: 2125,4970 2140,4985 2410,4985 2430,4965
  text "R5 = 39R for 3.3V" at 2085,5250 h60
  text "R5 = 100R for 5V" at 2085,5195 h60
  text "TX" at 710,5120 h60
  text "GND" at 2230,5005 h30
  text "V" at 2525,4760 h60 r90
  text "12V_F" at 2300,4655 h60 r90
  text "OUTPUT ONLY" at 2085,4635 h30 r90
  text "MISO" at 2175,4425 h30
  text "V" at 2430,4395 h30
  text "RX" at 725,4375 h60
  text "SCK" at 2185,4295 h30
  text "MOSI" at 2400,4295 h30
  text "RESET" at 2185,4195 h30
  text "GND" at 2415,4195 h30
  text "R8 = 750R for 5V" at 2435,3550 h60 r90
  text "R8 = 410R for 3.3V" at 2485,3550 h60 r90
  text "12V_IN" at 2325,3405 h60 r90
  text "GND" at 2165,3300 h30 r90
Mechanical 1:
  the board outline again, w3.94